# Altium PCB РАЗВОДКА.PcbDoc
Units mm, origin at the board's own origin, x right, y up, seen from the top; angles counter-clockwise.
Board outline 102.8 x 50.03 mm, 2 copper layers (Top Layer, Bottom Layer); 77 components, 52 nets, 326 pads, 63 vias.
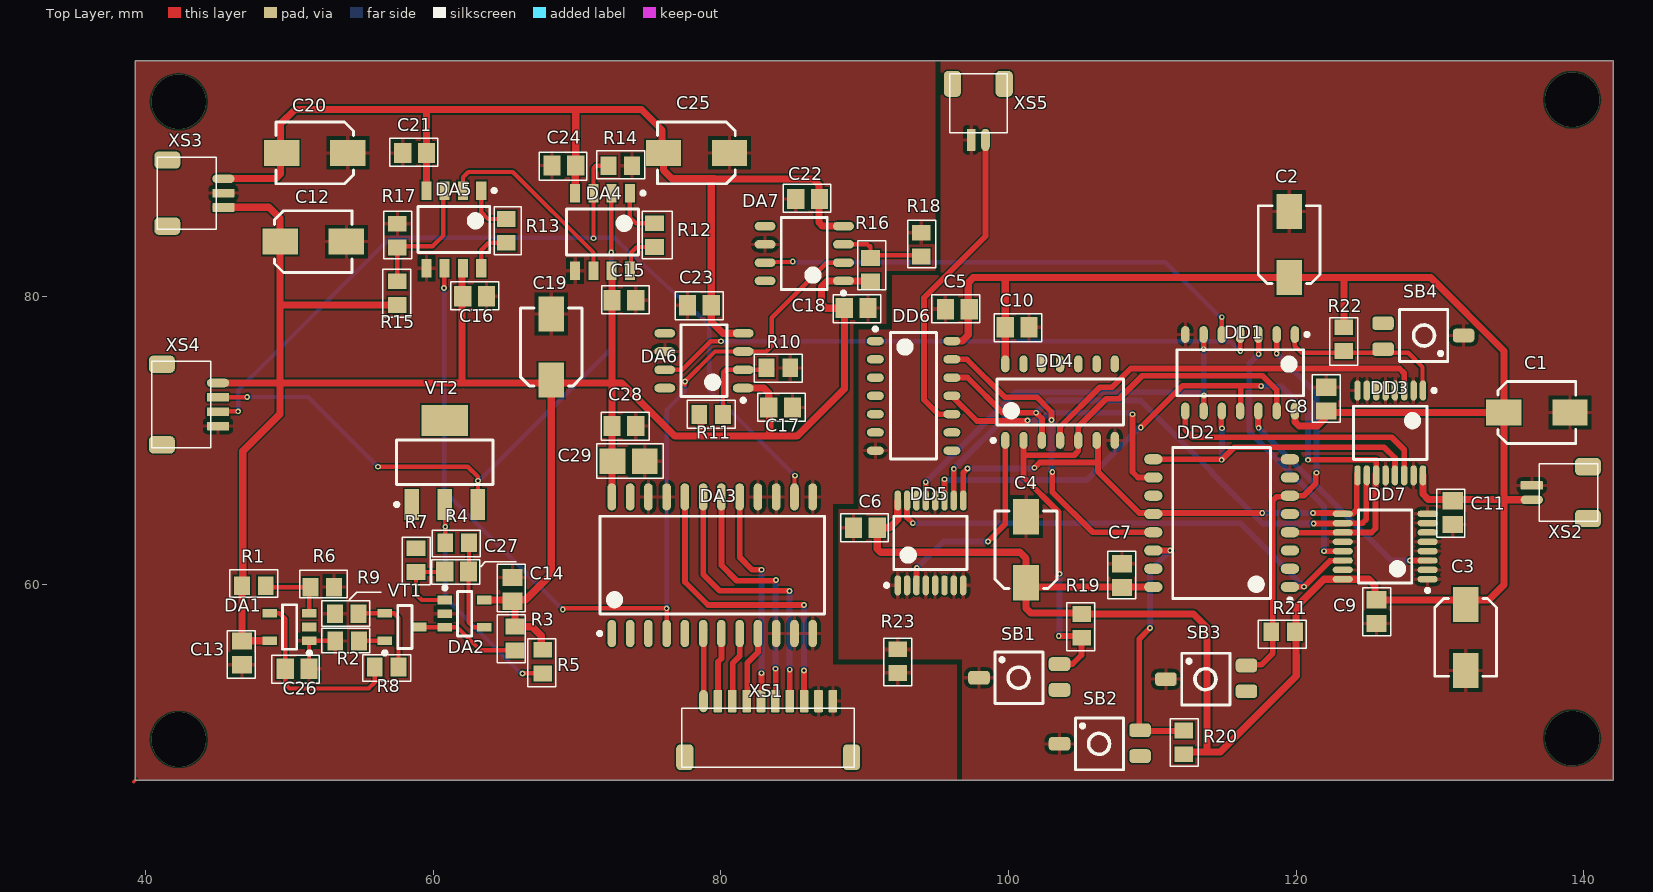
[diagram p0: Top Layer view]
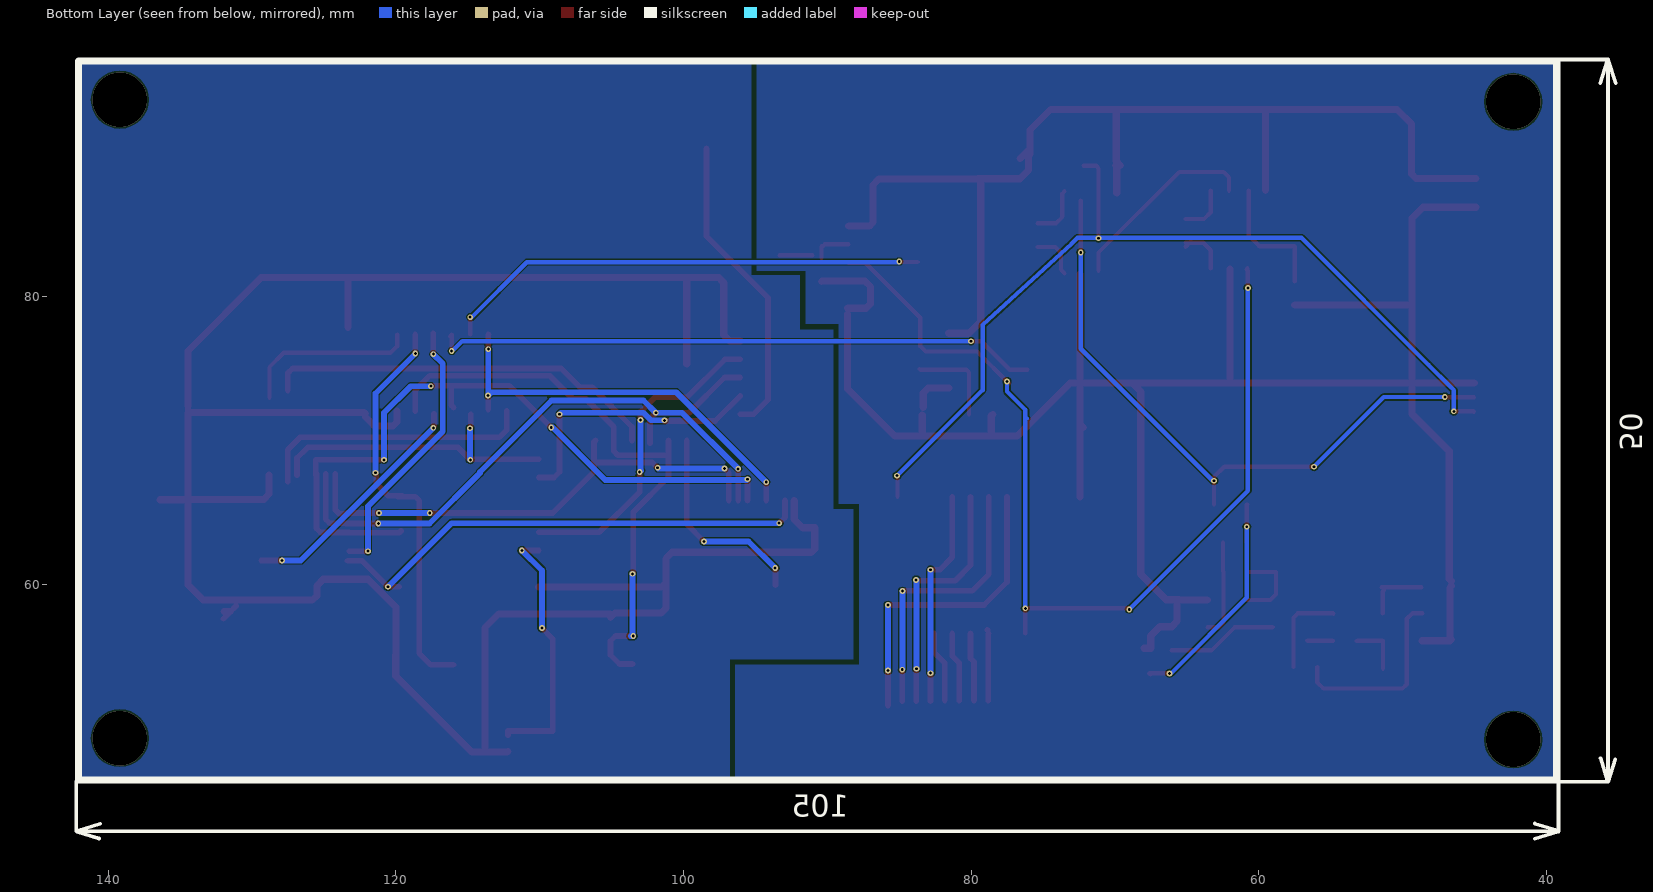
[diagram p1: Bottom Layer view, seen from below]
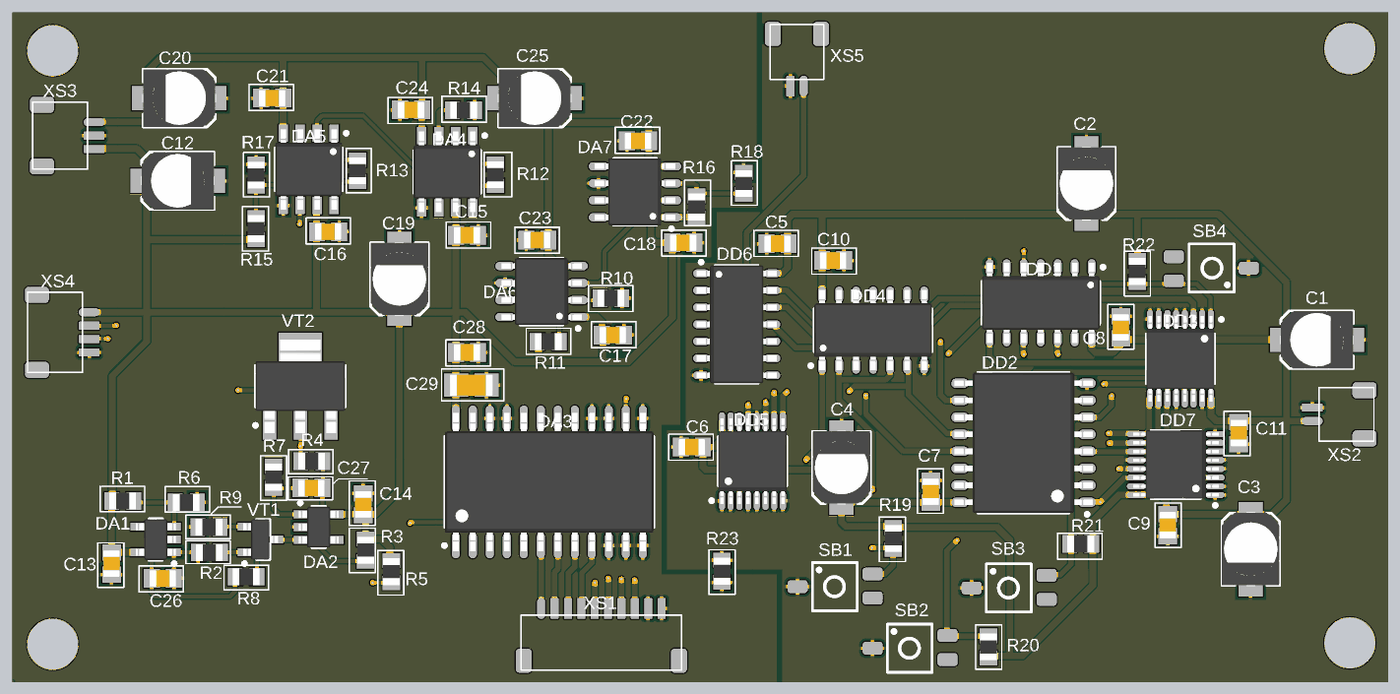
[diagram p2: 3D render of the assembled board from above, using the file's embedded part models]

## Layer stack, top to bottom
Top Solder: solder mask 0.0102, Solder Resist, Dk 3.5
Top Layer: signal copper 0.0356
Dielectric 1: dielectric 0.32, FR-4, Dk 4.8
Bottom Layer: signal copper 0.0356
Bottom Solder: solder mask 0.0102, Solder Resist, Dk 3.5

## Board outline
39.275,46.375 39.275,96.4 142.075,96.4 142.075,46.375

## Design rules (kind name [scope] priority, off if disabled: settings)
Clearance [All] p1: gap=0.1 ignorepadtopadclearanceinfootprint=FALSE except(0: Arc-Hole Track-Hole SMDPad-Hole THPad-Hole Via-Hole Fill-Hole Poly-Hole Region-Hole Text-Hole)
PolygonConnect [All] p1: connectstyle=Relief reliefconductorwidth=0.254 reliefentries=4 polygonreliefangle="90 Angle" airgapwidth=0.254
RoutingVias [All] p1: holewidth=0.1 width=1.27 viastyle="Through Hole" minholewidth=0.1 minwidth=0.1 maxholewidth=5 maxwidth=5
SolderMaskExpansion [All] p1: expansion=0.102
Width [All] p1: maxlimit=1 minlimit=0.1 preferedwidth=0.3
30 further rules are at their usual default settings.

## Components (designator, comment, footprint, x,y, rotation, side; value= is the part's Value field where it differs from the comment)
C5 "0.1uF" "Кер.ЧИП конд. 0.1 мкФ X7R 50В 10% 0805" 96.45,79.125 r0 top
C6 "0.1uF" "Кер.ЧИП конд. 0.1 мкФ X7R 50В 10% 0805" 90.05,63.925 r0 top
C7 "0.1uF" "Кер.ЧИП конд. 0.1 мкФ X7R 50В 10% 0805" 107.9,60.6 r270 top
C8 "0.1uF" "Кер.ЧИП конд. 0.1 мкФ X7R 50В 10% 0805" 122.1,72.875 r270 top
C9 "0.1uF" "Кер.ЧИП конд. 0.1 мкФ X7R 50В 10% 0805" 125.6,58.1 r90 top
C10 "0.1uF" "Кер.ЧИП конд. 0.1 мкФ X7R 50В 10% 0805" 100.6,77.875 r180 top
C11 "0.1uF" "Кер.ЧИП конд. 0.1 мкФ X7R 50В 10% 0805" 130.9,64.975 r90 top
C13 "0.1uF" "Кер.ЧИП конд. 0.1 мкФ X7R 50В 10% 0805" 46.7,55.225 r90 top
C14 "0.1uF" "Кер.ЧИП конд. 0.1 мкФ X7R 50В 10% 0805" 65.5,59.65 r270 top
C15 "0.1uF" "Кер.ЧИП конд. 0.1 мкФ X7R 50В 10% 0805" 73.25,79.75 r180 top
C16 "0.1uF" "Кер.ЧИП конд. 0.1 мкФ X7R 50В 10% 0805" 62.875,80.025 r180 top
C17 "0.1uF" "Кер.ЧИП конд. 0.1 мкФ X7R 50В 10% 0805" 84.15,72.3 r180 top
C18 "0.1uF" "Кер.ЧИП конд. 0.1 мкФ X7R 50В 10% 0805" 89.4,79.2 r180 top
C21 "0.1uF" "Кер.ЧИП конд. 0.1 мкФ X7R 50В 10% 0805" 58.7,90 r180 top
C22 "0.1uF" "Кер.ЧИП конд. 0.1 мкФ X7R 50В 10% 0805" 86.025,86.8 r180 top
C23 "0.1uF" "Кер.ЧИП конд. 0.1 мкФ X7R 50В 10% 0805" 78.5,79.4 r180 top
C24 "0.1uF" "Кер.ЧИП конд. 0.1 мкФ X7R 50В 10% 0805" 69.075,89.125 r180 top
C26 "1000pF" "Кер.ЧИП конд. 100пФ NPO 50В 5% 0805, GRM2165C1H101J" 50.525,54.125 r0 top
C27 "2200pF" "Кер.ЧИП конд. 100пФ NPO 50В 5% 0805, GRM2165C1H101J" 61.625,60.875 r180 top
C28 "0.1uF" "Кер.ЧИП конд. 0.1 мкФ X7R 50В 10% 0805" 73.25,71 r180 top
C29 "47uF" "Кер.ЧИП конд. 47 мкФ X5R 20% 10В 1206" 73.575,68.55 r180 top
DA1 "DA6" "ОУ для источника тока" 50,57.025 r180 top
DA2 "DA7" "ОУ для источника тока" 62.175,57.95 r0 top
DA3 "AD7824" AD7824 79.4,61.325 r90 top (schematic designator DA33)
DA4 "INA118E_BB" "AD620 Инструмент.усилитель" 71.77,84.5 r270 top
DA5 "INA118E_BB_1" "AD620 Инструмент.усилитель" 61.425,84.675 r270 top
DA6 "AD8561" AD8561 78.825,75.55 r180 top
DA7 "AD8561" AD8561 85.8,83 r180 top
DD1 "И №1 (4 компонента)" 4x2И 116.11,74.71 r270 top
DD2 "НЕ №3 (4 компонента)" CD4044B 114.825,64.25 r180 top
DD3 "74HC40510" Мультиплексор 126.55,70.525 r270 top
DD4 "И №2 (2 компонента)" 4x2И 103.59,72.665 r90 top
DD5 "74HC40510" Мультиплексор 94.575,62.875 r90 top
DD6 "3И №1" 4x2И 93.4,73.1 r0 top
DD7 "74HC40510" Мультиплексор 126.2,62.625 r180 top
R1 "3k" "0.125Вт 0805 3 кОм, 5%, Чип резистор (SMD)" 47.525,59.9 r0 top
R2 "200" "0.125Вт 0805 3 кОм, 5%, Чип резистор (SMD)" 54,56.05 r0 top
R3 "470" "0.125Вт 0805 3 кОм, 5%, Чип резистор (SMD)" 65.675,56.225 r90 top
R4 "10k" "0.125Вт 0805 3 кОм, 5%, Чип резистор (SMD)" 61.65,62.875 r180 top
R5 "4.7" "0.125Вт 0805 3 кОм, 5%, Чип резистор (SMD)" 67.6,54.625 r90 top
R6 "2k" "0.125Вт 0805 3 кОм, 5%, Чип резистор (SMD)" 52.275,59.8 r0 top
R7 "330" "0.125Вт 0805 3 кОм, 5%, Чип резистор (SMD)" 58.8,61.675 r90 top
R8 "10k" "0.125Вт 0805 3 кОм, 5%, Чип резистор (SMD)" 56.75,54.25 r0 top
R9 "2k" "0.125Вт 0805 3 кОм, 5%, Чип резистор (SMD)" 53.975,57.95 r0 top
R10 "1.5k" "0.125Вт 0805 15Ом, 5%, Чип резистор (SMD)" 84,75.05 r180 top
R11 "8.2k" "0.125Вт 0805 82Ом, 5%, Чип резистор (SMD)" 79.325,71.8 r180 top
R12 "200k" "0.125Вт 0805 200 кОм, 5%, Чип резистор (SMD)" 75.375,84.275 r90 top
R13 "160k" "0.125Вт 0805 160 кОм, 5%, Чип резистор (SMD)" 65.075,84.575 r90 top
R14 "51k" "0.125Вт 0805 51 кОм, 5%, Чип резистор (SMD)" 73,89.1 r0 top
R15 "7.5k" "0.125Вт 0805 75Ом, 5%, Чип резистор (SMD)" 57.5,80.25 r90 top
R16 "1k" "0.125Вт 0805 91Ом, 5%, Чип резистор (SMD)" 90.4,81.875 r90 top
R17 "2.2k" "0.125Вт 0805 22Ом, 5%, Чип резистор (SMD)" 57.5,84.25 r270 top
R18 "56" "0.125Вт 0805 5.1Ом, 5%, Чип резистор (SMD)" 93.925,83.625 r270 top
R19 "10k" "0.125Вт 0805 3 кОм, 5%, Чип резистор (SMD)" 105.1,57.1 r90 top (schematic designator R22)
R20 "10k" "0.125Вт 0805 3 кОм, 5%, Чип резистор (SMD)" 112.2,49 r270 top
R21 "10k" "0.125Вт 0805 3 кОм, 5%, Чип резистор (SMD)" 119.1,56.7 r0 top
R22 "10k" "0.125Вт 0805 3 кОм, 5%, Чип резистор (SMD)" 123.325,77.05 r90 top (schematic designator R19)
R23 "0" "0.125Вт 0805 82Ом, 5%, Чип резистор (SMD)" 92.3,54.65 r270 top
SB1 "Выключатель кнопочный с замыкающим контактом" "Выключатель кнопочный ese21x" 100.7,53.5 r0 top (schematic designator SB4)
SB2 "Выключатель кнопочный с замыкающим контактом" "Выключатель кнопочный ese21x" 106.3,48.9 r0 top
SB3 "Выключатель кнопочный с замыкающим контактом" "Выключатель кнопочный ese21x" 113.7,53.4 r0 top
SB4 "Выключатель кнопочный с замыкающим контактом" "Выключатель кнопочный ese21x" 128.9,77.3 r180 top (schematic designator SB1)
VT1 "Транзистор N-канальный" "Транзистор N-канальный" 57.825,57.025 r0 top
VT2 "Транзистор р-канальный" "Транзистор р-канальный" 60.8,68.475 r90 top
XS1 "XS 10Pin" CI1108M1H 77.29,49.67 r0 top
XS2 "XS 2Pin (D)" "CI1102M1H  (F)" 138.6,64.375 r90 top
XS3 "XS 3Pin (A)" "CI1108M1H - duplicate" 43.2,89.7 r270 top
XS4 "XS Датчик" CI1102M1H 42.825,75.5 r270 top
XS5 "XS 2Pin_1" "CI1102M1H  (F)" 99.9,93.1 r180 top
С1 "1uF" "ECAP SMD, 1 мкФ, 50В, Конденсатор электролитический алюминиевый SMD" 136.75,71.95 r0 top
С2 "1uF" "ECAP SMD, 1 мкФ, 50В, Конденсатор электролитический алюминиевый SMD" 119.525,83.625 r90 top
С3 "1uF" "ECAP SMD, 1 мкФ, 50В, Конденсатор электролитический алюминиевый SMD" 131.8,56.3 r270 top
С4 "1uF" "ECAP SMD, 1 мкФ, 50В, Конденсатор электролитический алюминиевый SMD" 101.225,62.4 r90 top
С12 "1uF" "ECAP SMD, 1 мкФ, 50В, Конденсатор электролитический алюминиевый SMD" 51.65,83.825 r0 top
С19 "1uF" "ECAP SMD, 1 мкФ, 50В, Конденсатор электролитический алюминиевый SMD" 68.2,76.5 r90 top
С20 "1uF" "ECAP SMD, 1 мкФ, 50В, Конденсатор электролитический алюминиевый SMD" 51.75,90 r180 top
С25 "1uF" "ECAP SMD, 1 мкФ, 50В, Конденсатор электролитический алюминиевый SMD" 78.3,90 r180 top

## Footprints (in the part's own frame and the unit in brackets; to place one, negate y for a bottom-side part, rotate by r counter-clockwise, add the part's x,y. Pads: shape width x height; smd on the part's side, far side on the other; paste and mask are expansions set on the pad)
"0.125Вт 0805 3 кОм, 5%, Чип резистор (SMD)" [mm]
  rect 1.1x1.3 smd: 1(-0.825,0) 2(0.825,0)
  body extent -1,-0.63 1,0.63, height 0.5
"0.125Вт 0805 5.1Ом, 5%, Чип резистор (SMD)" [mm]
  rect 1.1x1.3 smd: 1(-0.825,0) 2(0.825,0)
  body extent -1,-0.63 1,0.63, height 0.5
"0.125Вт 0805 15Ом, 5%, Чип резистор (SMD)" [mm]
  rect 1.1x1.3 smd: 1(-0.825,0) 2(0.825,0)
  body extent -1,-0.63 1,0.63, height 0.5
"0.125Вт 0805 22Ом, 5%, Чип резистор (SMD)" [mm]
  rect 1.1x1.3 smd: 1(-0.825,0) 2(0.825,0)
  body extent -1,-0.63 1,0.63, height 0.5
"0.125Вт 0805 51 кОм, 5%, Чип резистор (SMD)" [mm]
  rect 1.1x1.3 smd: 1(-0.825,0) 2(0.825,0)
  body extent -1,-0.63 1,0.63, height 0.5
"0.125Вт 0805 75Ом, 5%, Чип резистор (SMD)" [mm]
  rect 1.1x1.3 smd: 1(-0.825,0) 2(0.825,0)
  body extent -1,-0.63 1,0.63, height 0.5
"0.125Вт 0805 82Ом, 5%, Чип резистор (SMD)" [mm]
  rect 1.1x1.3 smd: 1(-0.825,0) 2(0.825,0)
  body extent -1,-0.63 1,0.63, height 0.5
"0.125Вт 0805 91Ом, 5%, Чип резистор (SMD)" [mm]
  rect 1.1x1.3 smd: 1(-0.825,0) 2(0.825,0)
  body extent -1,-0.63 1,0.63, height 0.5
"0.125Вт 0805 160 кОм, 5%, Чип резистор (SMD)" [mm]
  rect 1.1x1.3 smd: 1(-0.825,0) 2(0.825,0)
  body extent -1,-0.63 1,0.63, height 0.5
"0.125Вт 0805 200 кОм, 5%, Чип резистор (SMD)" [mm]
  rect 1.1x1.3 smd: 1(-0.825,0) 2(0.825,0)
  body extent -1,-0.63 1,0.63, height 0.5
4x2И [mm] "MC74ACT08DG, Логический элемент И, 74ACT08, 2 входа, 24мА, 4.5В до 5.5В, SOIC-14"
  oval 1.18x0.58 smd: 1(-2.66,3.81) 2(-2.66,2.54) 3(-2.66,1.27) 4(-2.66,0) 5(-2.66,-1.27) 6(-2.66,-2.54) 7(-2.66,-3.81) 8(2.66,-3.81) 9(2.66,-2.54) 10(2.66,-1.27) 11(2.66,0) 12(2.66,1.27) 13(2.66,2.54) 14(2.66,3.81)
  silkscreen extent -2.78,-4.4 1.6,4.78, body extent -3,-4.4 3,4.4, height 1.75
"AD620 Инструмент.усилитель" [mm] "SOIC, 8-Leads, Body 4,90x3,90mm, Pitch 1,27mm, IPC Medium Density"
  rect 1.28x0.7 smd: 1(-2.7,1.905) 2(-2.7,0.635) 3(-2.7,-0.635) 4(-2.7,-1.905) 5(2.7,-1.905) 6(2.7,-0.635) 7(2.7,0.635) 8(2.7,1.905)
  silkscreen extent -2.82,-2.5 1.6,2.93, body extent -3,-2.5 3,2.5, height 1.75
AD7824 [mm] "SOIC, 24-Leads, Body 15,40x7,50mm, Pitch 1,27mm, IPC Medium Density"
  oval 1.9x0.6 smd: 1(-4.75,6.985) 2(-4.75,5.715) 3(-4.75,4.445) 4(-4.75,3.175) 5(-4.75,1.905) 6(-4.75,0.635) 7(-4.75,-0.635) 8(-4.75,-1.905) 9(-4.75,-3.175) 10(-4.75,-4.445) 11(-4.75,-5.715) 12(-4.75,-6.985) 13(4.75,-6.985) 14(4.75,-5.715) 15(4.75,-4.445) 16(4.75,-3.175) 17(4.75,-1.905) 18(4.75,-0.635) 19(4.75,0.635) 20(4.75,1.905) 21(4.75,3.175) 22(4.75,4.445) 23(4.75,5.715) 24(4.75,6.985)
  silkscreen extent -4.87,-7.8 3.4,7.96, body extent -5.16,-7.8 5.16,7.8, height 2.65
AD8561 [mm] "SOIC, 8-Leads, Body 4,90x3,90mm, Pitch 1,27mm, IPC Medium Density"
  oval 1.45x0.6 smd: 1(-2.725,1.905) 2(-2.725,0.635) 3(-2.725,-0.635) 4(-2.725,-1.905) 5(2.725,-1.905) 6(2.725,-0.635) 7(2.725,0.635) 8(2.725,1.905)
  silkscreen extent -2.85,-2.5 1.6,2.88, body extent -3,-2.5 3,2.5, height 1.75
CD4044B [mm] "SOIC, 16-Leads, Body 10,30x7,50mm, Pitch 1,27mm, IPC Medium Density"
  oval 1.28x0.7 smd: 1(-4.75,4.445) 2(-4.75,3.175) 3(-4.75,1.905) 4(-4.75,0.635) 5(-4.75,-0.635) 6(-4.75,-1.905) 7(-4.75,-3.175) 8(-4.75,-4.445) 9(4.75,-4.445) 10(4.75,-3.175) 11(4.75,-1.905) 12(4.75,-0.635) 13(4.75,0.635) 14(4.75,1.905) 15(4.75,3.175) 16(4.75,4.445)
  silkscreen extent -4.88,-5.25 3.4,5.47, body extent -5.16,-5.25 5.16,5.25, height 2.65
CI1102M1H [mm]
  oval 0.6x1.55 smd: 1(1.5,2.2)
  rrect20% 0.6x1.55 smd: 2(2.5,2.2) 3(3.5,2.2) 4(4.5,2.2)
  rrect50% 1.2x1.8 smd: 5(0.2,-1.7) 6(5.8,-1.7)
  silkscreen extent 0,-2.4 6,1.7
"CI1102M1H  (F)" [mm]
  oval 0.6x1.55 smd: 1(1.5,2.2)
  rrect20% 0.6x1.55 smd: 2(2.5,2.2)
  rrect50% 1.2x1.8 smd: 3(0.2,-1.7) 4(3.8,-1.7)
  silkscreen extent 0,-2.4 4,1.7
CI1108M1H [mm]
  oval 0.6x1.55 smd: 1(1.5,2.2)
  rrect20% 0.6x1.55 smd: 2(2.5,2.2) 3(3.5,2.2) 4(4.5,2.2) 5(5.5,2.2) 6(6.5,2.2) 7(7.5,2.2) 8(8.5,2.2) 9(9.5,2.2) 10(10.5,2.2)
  rrect50% 1.2x1.8 smd: 11(0.2,-1.7) 12(11.8,-1.7)
  silkscreen extent 0,-2.4 12,1.7
"CI1108M1H - duplicate" [mm]
  rrect20% 0.6x1.55 smd: 1(3.5,2.2) 2(2.5,2.2)
  oval 0.6x1.55 smd: 3(1.5,2.2)
  rrect50% 1.2x1.8 smd: 4(0.2,-1.7) 5(4.8,-1.7)
  silkscreen extent 0,-2.4 5,1.7
"ECAP SMD, 1 мкФ, 50В, Конденсатор электролитический алюминиевый SMD" [mm] "ECAP SMD, 1 мкФ, 50В, Конденсатор электролитический алюминиевый SMD"
  rect 2.45x1.8 smd: 1(-2.3,0) 2(2.3,0)
  silkscreen extent -2.7,-2.15 2.7,2.15, body extent -2.75,-2.15 2.75,2.15, height 5.4
"Выключатель кнопочный ese21x" [mm] "SOTFL, 3-Leads, Body 3,62x1,60mm, Pitch 1,50mm, IPC Medium Density"
  rrect50% 1.5x0.95 smd: 1(-2.75,0) 2(2.85,0.95) 3(2.85,-0.85)
  silkscreen extent -1.65,-1.8 1.7,1.8
"Кер.ЧИП конд. 0.1 мкФ X7R 50В 10% 0805" [mm]
  rect 1.2x1.4 smd: 1(-0.825,0) 2(0.825,0)
  body extent -1,-0.63 1,0.63, height 1.3
"Кер.ЧИП конд. 47 мкФ X5R 20% 10В 1206" [mm] "Кер.ЧИП конд. 47 мкФ X5R 20% 10В 1206"
  rect 1.8x1.75 smd: 1(-1.125,0) 2(1.125,0)
  body extent -1.6,-0.8 1.6,0.8, height 1.5
"Кер.ЧИП конд. 100пФ NPO 50В 5% 0805, GRM2165C1H101J" [mm]
  rect 1.2x1.4 smd: 1(-0.825,0) 2(0.825,0)
  body extent -1,-0.63 1,0.63, height 1.3
Мультиплексор [mm] "TSOP, 16-Leads, Body 5,00x4,40mm, Pitch 0,65mm, IPC Medium Density"
  oval 1.4x0.45 smd: 1(-2.95,2.275) 2(-2.95,1.625) 3(-2.95,0.975) 4(-2.95,0.325) 5(-2.95,-0.325) 6(-2.95,-0.975) 7(-2.95,-1.625) 8(-2.95,-2.275) 9(2.95,-2.275) 10(2.95,-1.625) 11(2.95,-0.975) 12(2.95,-0.325) 13(2.95,0.325) 14(2.95,0.975) 15(2.95,1.625) 16(2.95,2.275)
  silkscreen extent -3.07,-2.55 1.85,3.17, body extent -3.2,-2.55 3.2,2.55, height 0.95
"ОУ для источника тока" [mm] "SOT23, 5-Leads, Body 2,90x2,80mm, Pitch 0,95mm, IPC Medium Density"
  rect 1x0.6 smd: 1(-1.375,0.95) 2(-1.375,0) 3(-1.375,-0.95) 4(1.375,-0.95) 5(1.375,0.95)
  silkscreen extent -1.5,-1.55 0.5,1.92, body extent -1.5,-1.53 1.5,1.53, height 1.45
"Транзистор N-канальный" [mm] "SOT23, 3-Leads, Body 2,92x2,45mm, Pitch 0,95mm, IPC Medium Density"
  rect 1x0.6 smd: 1(-1.2,-0.95) 2(-1.2,0.95) 3(1.2,0)
  silkscreen extent -1.32,-1.92 0.7,1.5, body extent -1.3,-1.52 1.3,1.52, height 1.12
"Транзистор р-канальный" [mm] "SOT223, 4-Leads, Body 6,50x7,00mm (avg), Pitch 2,30mm, IPC Medium Density"
  rect 2.15x1 smd: 1(-2.925,2.3) 2(-2.925,0) 3(-2.925,-2.3)
  rect 2.15x3.25 smd: 4(2.925,0)
  silkscreen extent -3.05,-3.35 1.55,3.47, body extent -3.5,-3.35 3.5,3.35, height 1.75

## Part data
C5 C6 C7 C8 C9 C10 C11 C13 C14 C15 C16 C17 C18 C21 C22 C23 C24 C28: library part "Кер.ЧИП конд. 0.1 мкФ X7R 50В 10% 0805", "Кер.ЧИП конд. 0.1 мкФ X7R 50В 10% 0805"
C26 C27: library part "Кер.ЧИП конд. 100пФ NPO 50В 5% 0805, GRM2165C1H101J", "Кер.ЧИП конд. 100пФ NPO 50В 5% 0805, GRM2165C1H101J"
C29: library part "Кер.ЧИП конд. 47 мкФ X5R 20% 10В 1206", "Кер.ЧИП конд. 47 мкФ X5R 20% 10В 1206"
DA1 DA2: library part "OPAx333 1.8-V, microPower, CMOS Operational Amplifiers, Zero-Drift Series", "ОУ"
DD3 DD5 DD7: library part Мультиплексор
R1 R2 R3 R4 R5 R6 R7 R8 R9 R19 R20 R21 R22: library part "0.125Вт 0805 5кОм, 5%, Чип резистор (SMD)", "0.125Вт 0805 5кОм, 5%, Чип резистор (SMD)"
R10: library part "0.125Вт 0805 15Ом, 5%, Чип резистор (SMD)_2_1", "0.125Вт 0805 15Ом, 5%, Чип резистор (SMD)"
R11 R23: library part "0.125Вт 0805 82Ом, 5%, Чип резистор (SMD)_2_2", "0.125Вт 0805 82Ом, 5%, Чип резистор (SMD)"
R12: library part "0.125Вт 0805 200 кОм, 5%, Чип резистор (SMD)", "0.125Вт 0805 200 кОм, 5%, Чип резистор (SMD)"
R13: library part "0.125Вт 0805 160 кОм, 5%, Чип резистор (SMD)", "0.125Вт 0805 160 кОм, 5%, Чип резистор (SMD)"
R14: library part "0.125Вт 0805 51 кОм, 5%, Чип резистор (SMD)", "0.125Вт 0805 51 кОм, 5%, Чип резистор (SMD)"
R15: library part "0.125Вт 0805 75Ом, 5%, Чип резистор (SMD)", "0.125Вт 0805 75Ом, 5%, Чип резистор (SMD)"
R16: library part "0.125Вт 0805 91кОм, 5%, Чип резистор (SMD)_1", "0.125Вт 0805 91Ом, 5%, Чип резистор (SMD)"
R17: library part "0.125Вт 0805 22Ом, 5%, Чип резистор (SMD)", "0.125Вт 0805 22Ом, 5%, Чип резистор (SMD)"
R18: library part "0.125Вт 0805 5.1Ом, 5%, Чип резистор (SMD)_2", "0.125Вт 0805 5.1Ом, 5%, Чип резистор (SMD)"
VT1: "SI2304DDS-T1-GE3"
VT2: "NTF2955T1G, МОП-транзистор, P Канал, 2.6 А, -60 В, 0.17 Ом, 20 В, -4 В"
С1 С2 С3 С4 С12 С19 С20 С25: library part "ECAP SMD, 1 мкФ, 50В, Конденсатор электролитический алюминиевый SMD", "ECAP SMD, 1 мкФ, 50В, Конденсатор электролитический алюминиевый SMD"

## Via types
v1: diameter 0.4, hole 0.2, Top Layer to Bottom Layer, 59 vias
v2: diameter 3.8, hole 3.8, Top Layer to Bottom Layer, 4 vias

## Nets (pads, with @x,y where several pads share a name; then routed paths per layer and width w, separated by ;. In a path a pad name is that pad's centre, name@x,y a point inside that pad or via, vN(x,y) a via of type N, cw(c..) or ccw(c..) an arc to the next point about the centre after c; other vN are vias at no path point)
"+5V A": C13.2 C14.2 C15.2 C16.2 C17.2 C18.2 C28.2 C29.2 DA1.5 DA2.5 DA3.24 DA4.7 DA5.7 DA6.1 DA7.1 R1.1 R3.2 R5.2 R11.2 R15.1 R16.1 XS3.1 XS4.1 С12.1 С19.1 | length 156.4
  Top Layer w0.5: XS3.1@44.9,86.225 48.569,86.225 49.325,85.469 49.325,79.3 ; XS4.1@45,74 XS4.1 49.325,74 ; C13.2@46.6,56.15 C13.2 46.7,59.775 R1.1@46.6,59.875 ; R1.1@46.6,60.225 46.75,60.375 46.75,69.25 49.325,71.825 49.325,74 ; C13.2@46.782,56.075 DA1.5 ; R15.1 49.45,79.425 49.325,79.3 ; DA5.7@62,81.925 62,74 49.325,74 ; 62.15,74 72.424,74 ; DA2.5 65.499,58.924 66.424,58.924 68.2,60.7 68.2,73.4 С19.1@68.725,73.925 ; C14.2@65.675,58.575 65.675,57.425 66.05,57.05 66.875,57.05 67.5,56.425 67.5,55.55 R5.2@67.975,55.55 ; C28.2@72.175,70.9 C28.2@72.385,71.11 ; C28.2@72.35,71 72.415,70.935 DA3.24 ; DA4.7@72.424,81.561 72.424,74 ; C28.2 72.425,73.96 72.424,74 ; R11.2 R11.2@78.575,71.725 ; R11.2@78.6,71.725 78.6,70.3 ; DA6.1 82.98,73.645 83.325,73.3 C17.2 ; C17.2@83.4,71.775 83.4,70.3 ; C18.2 87.3,79.2 87,79.5 87,80.7 87.395,81.095 DA7.1 90.355,81.095 R16.1 ; C18.2@88.6,78.8 88.6,73.6 85.3,70.3 83.4,70.3 ; 49.325,74 49.325,79.3 ; 72.424,74 73.1,74 76.8,70.3 78.6,70.3 ; 78.6,70.3 83.4,70.3
"+5V D": C5.2 C6.2 C7.2 C8.2 C9.2 C10.2 C11.2 DD1.14 DD2.16 DD3.16 DD4.14 DD5.16 DD6.14 DD7.16 R19.2 R20.2 R21.2 R22.2 XS2.1 С1.1 С2.1 С3.1 С4.1 | length 178.2
  Top Layer w0.4: C8.2@122.125,71.625 C8.2@122.125,71.875 ; С3.1@131.1,58.5 131.5,58.1 С3.1@131.725,57.875 ; С3.1@131.95,58.1 С3.1@131.725,57.875 ; С3.1@132,57.6 С3.1@131.725,57.875 ; С1.1@134.47,71.95 С1.1@134.47,72.38
  Top Layer w0.5: DD5.16 92.3,64.5 91.725,63.925 C6.2 90.875,62.45 91.1,62.225 100.8,62.225 101.225,61.8 С4.1 ; DD6.14 96.785,76.91 97.2,77.325 97.2,80.975 97.55,81.325 99.775,81.325 ; DD4.14 99.78,77.87 C10.2 99.775,81.325 ; R19.2@105.075,57.7 104.775,58 101.55,58 101.225,58.325 С4.1 ; R19.2 112.875,57.925 113.8,57 113.8,48.325 ; DD2.16 101.52,59.805 С4.1 ; R20.2@112.2,48.375 112.25,48.325 113.8,48.325 ; DD1.14 119.92,71.28 120.2,71 121.5,71 C8.2@122.125,71.625 ; C8.2@122.125,71.875 122.2,71.95 134.47,71.95 134.47,65.875 ; R22.2 123.325,81.25 123.4,81.325 ; DD3.16 128.825,66.275 129.2,65.9 134.395,65.9 134.42,65.875 ; С3.1@131.5,58.1 С3.1@131.95,58.1 ; С1.1@134.47,72.38 134.47,76.23 129.375,81.325 123.4,81.325 ; XS2.1 134.47,65.875 ; 99.775,81.325 С2.1 123.4,81.325 ; 113.8,48.325 114.725,48.325 120.013,53.613 120.005,56.7 120,58.4 121.95,60.35 DD7.16 125.05,60.35 125.5,59.9 125.5,59.2 125.8,58.9 133.4,58.9 134.47,59.97 134.47,65.825 134.42,65.875 ; 134.42,65.875 134.47,65.875
"-5V A": C21.1 C22.1 C23.1 C24.1 DA4.4 DA5.4 DA6.4 DA7.4 XS3.3 С20.2 С25.2 | length 79.4
  Top Layer w0.5: XS3.3@44.9,88.225 49.05,88.225 49.375,88.55 49.375,92.025 50.375,93.025 59.52,93.025 ; DA5.4 59.52,93.025 ; C24.1@69.6,89.125 69.9,89.425 69.9,93.025 ; DA4.4 69.865,89.04 C24.1@69.95,89.125 ; С25.2@75.9,89.9 75.9,91.6 74.475,93.025 69.9,93.025 ; С25.2@76.6,89.6 76,90.2 С25.2 76,88.8 76.6,88.2 79.325,88.2 ; DA6.4 80.145,77.455 79.325,78.275 C23.1 79.325,88.2 ; DA7.4 87.07,84.905 86.825,85.15 86.825,87.775 86.425,88.175 79.525,88.175 79.55,88.2 79.325,88.2 ; 59.52,93.025 69.9,93.025
A: C13.1 C14.1 C15.1 C16.1 C17.1 C18.1 C21.2 C22.2 C23.2 C24.2 C26.2 C28.1 C29.1 DA1.1 DA2.2 DA3.10 DA3.11 DA3.12 DA3.13 DA3.15 DA3.16 DA3.21 DA3.22 DA4.5 DA5.5 DA6.6 DA7.6 R2.1 R6.2 R9.1 R10.1 R14.2 R17.1 R18.1 R23.2 XS1.9 XS1.10 XS3.2 XS4.4 С12.2 С19.2 С20.1 С25.1 | length 3.8
  Top Layer w0.3: C26.2 51.35,56.05 DA1.1 53.15,56.075 R2.1
D: C5.1 C6.1 C7.1 C8.1 C9.1 C10.1 C11.1 DD1.7 DD2.8 DD3.2 DD3.4 DD3.5 DD3.7 DD3.8 DD3.12 DD3.15 DD4.7 DD5.1 DD5.2 DD5.4 DD5.5 DD5.7 DD5.8 DD5.12 DD6.7 DD7.1 DD7.2 DD7.4 DD7.5 DD7.7 DD7.8 DD7.12 DD7.15 R23.1 SB1.1 SB2.1 SB3.1 SB4.1 XS2.2 XS5.2 С1.2 С2.2 С3.2 С4.2
NetC26_1: C26.1 DA1.4 R8.1 | length 13.4
  Top Layer w0.3: DA1.4 49.325,57.975 49.7,57.6 C26.1 49.7,53.05 50,52.75 55.5,52.75 55.925,53.175 R8.1
NetC27_1: C27.1 DA2.4 R4.1 | length 6.8
  Top Layer w0.3: R4.1 62.475,60.9 C27.1 62.45,57.35 62.8,57 DA2.4
NetC27_2: C27.2 DA2.1 R7.1 | length 5.8
  Top Layer w0.3: DA2.1@60.775,58.925 DA2.1 59.2,58.9 58.8,59.3 R7.1 60.775,60.85 C27.2
NetDA1_3: DA1.3 R1.2 R6.1 | length 4.4
  Top Layer w0.3: R1.2@48.7,59.8 R6.1 ; R6.1@51.3,59.575 51.375,59.5 DA1.3
NetDA2_3: DA2.3 R3.1 VT1.3 | length 7.7
  Top Layer w0.3: VT1.3 59.05,57 DA2.3 61.675,57 63.275,55.4 R3.1 R3.1@66.05,55.4
NetDA4_1: DA4.1 R12.2 | length 3.7
  Top Layer w0.3: DA4.1@73.505,87.325 73.65,87.18 73.65,85.55 74.1,85.1 R12.2
NetDA4_2: DA4.2 VT2.3 XS4.2 | length 45.7
  Top Layer w0.3: XS4.2 47.025,73 v1(47.05,73.025) ; v1(56.15,68.175) 62.4,68.175 63.1,67.475 v1(63.1,67.2) VT2.3 ; v1(72.375,83.075) DA4.2@72.375,86.665
  Bottom Layer w0.3: v1(47.05,73.025) 51.3,73.025 v1(56.15,68.175) ; v1(63.1,67.2) 63.2,67.2 72.375,76.375 v1(72.375,83.075)
NetDA4_3: DA3.14 DA4.3 R14.1 XS4.3 | length 62.9
  Top Layer w0.3: XS4.3 45.05,72.025 v1(46.425,72.025) ; v1(71.135,84.065) DA4.3 71.135,88.935 71.3,89.1 R14.1 ; v1@85.1,67.6 85.115,67.585 DA3.14
  Bottom Layer w0.3: v1(46.425,72.025) 46.425,73.5 46.675,73.75 48.212,75.287 57.025,84.1 72.6,84.1 72.995,83.704 79.2,78.028 79.2,73.5 v1(85.15,67.55)
NetDA4_6: DA4.6 DA5.2 | length 13.7
  Top Layer w0.3: DA5.2 62.06,88.31 62.425,88.675 65.525,88.675 71.135,83.065 DA4.6
NetDA4_8: DA4.8 R12.1 | length 3.3
  Top Layer w0.3: DA4.8@73.505,81.625 73.75,81.87 73.75,83.05 74.15,83.45 R12.1
NetDA5_1: DA5.1 R13.2 | length 3.4
  Top Layer w0.3: DA5.1 63.33,85.87 63.8,85.4 R13.2
NetDA5_3: DA5.3 R15.2 R17.2 | length 9
  Top Layer w0.3: R15.2 R17.2 ; R17.2@57.5,83.5 59.95,83.5 60.7,84.25 DA5.3@60.7,87.375
NetDA5_6: DA3.4 DA5.6 DA6.3 DA7.2 | length 68.8
  Top Layer w0.3: v1(60.75,80.6) 60.75,81.815 60.85,81.915 DA5.6 ; v1@69,58.325 v1(76.225,58.325) DA3.4 ; v1(77.5,74.1) 77.5,73.87 77.385,73.985 79.585,76.185 DA6.3 83.16,76.185 83.538,76.563 83.538,78.538 87.365,82.365 DA7.2
  Bottom Layer w0.3: v1(60.75,80.6) 60.75,66.5 v1(69,58.25) ; 76.125,71.525 76.225,71.625 ; v1(76.225,58.325) 76.225,71.625 ; v1(77.5,74.1) 77.5,73.4 76.225,72.125 76.225,71.625
NetDA5_8: DA5.8 R13.1 | length 3.7
  Top Layer w0.3: DA5.8 63.33,83.23 63.85,83.75 R13.1@64.8,83.75 ; R13.1@64.7,83.85 R13.1@64.8,83.75 ; R13.1@65.075,83.475 R13.1@64.8,83.75 ; R13.1 R13.1@64.8,83.75
NetDA6_2: DA6.2 R10.2 R11.1 | length 6.5
  Top Layer w0.3: R11.1 80.15,74.75 80.315,74.915 DA6.2 83.515,74.915 R10.2@83.575,74.975
NetDA6_7: DA6.7 DD1.4 | length 42.2
  Top Layer w0.3: DA6.7 77.315,74.915 79.3,76.9 v1(80,76.9) ; v1@116.11,76.335 DD1.4 116.225,77.255 DD1.4@116.15,77.18
  Bottom Layer w0.3: v1(80,76.9) 115.4,76.9 v1@115.975,76.325
  other v1: 116.125,76.225
NetDA7_3: DA7.3 R16.2 R18.2 | length 5
  Top Layer w0.3: DA7.3 90.19,83.635 90.325,83.5 90.4,83.5 R16.2 ; R16.2@91.025,82.875 91.925,82.875 R18.2@93.325,82.875
NetDA7_7: DA7.7 DD1.5 | length 34
  Top Layer w0.3: DA7.7@83.7,82.415 v1@85.06,82.415 ; DD1.5 v1(114.84,78.575)
  Bottom Layer w0.3: v1@85,82.4 110.9,82.4 v1@114.782,78.517
  other v1: 85,82.45
NetDA33_6: DA3.6 XS1.1 | length 4.7
  Top Layer w0.4: DA3.6 78.8,56.54 XS1.1@78.8,51.9 ; DA3.6@78.845,56.8 DA3.6@78.87,56.825
NetDA33_7: DA3.7 XS1.2 | length 4.8
  Top Layer w0.4: XS1.2@79.805,51.915 79.805,54.605 80.035,54.835 DA3.7
NetDA33_8: DA3.8 XS1.3 | length 4.9
  Top Layer w0.4: XS1.3@80.825,51.9 80.825,54.525 81.305,55.005 DA3.8
NetDA33_9: DA3.9 XS1.4 | length 5
  Top Layer w0.4: XS1.4@81.83,51.915 81.83,54.53 82.575,55.275 DA3.9
NetDA33_17: DA3.17 XS1.5 | length 15.2
  Top Layer w0.4: DA3.17 81.305,61.87 82.165,61.01 v1(82.815,61.01) ; XS1.5@82.815,51.87 v1(82.815,53.815)
  Bottom Layer w0.4: v1(82.815,53.815) v1(82.815,61.01)
NetDA33_18: DA3.18 XS1.6 | length 17.4
  Top Layer w0.4: DA3.18 80.035,61.315 81.1,60.25 v1@83.775,60.25 ; v1(83.8,54.125) 83.82,54.105 XS1.6@83.82,51.885
  Bottom Layer w0.4: v1(83.8,54.125) v1@83.8,60.3
  other v1: 83.825,60.3
NetDA33_19: DA3.19 XS1.7 | length 19.4
  Top Layer w0.4: DA3.19 78.765,60.685 79.9,59.55 v1@84.725,59.55 ; XS1.7 v1(84.79,54.06)
  Bottom Layer w0.4: v1@84.775,54.1 v1(84.775,59.525)
NetDA33_20: DA3.20 XS1.8 | length 21.8
  Top Layer w0.4: DA3.20 77.495,60.155 79.1,58.55 v1(85.775,58.55) ; XS1.8@85.775,51.575 v1(85.775,54)
  Bottom Layer w0.4: v1(85.775,54) v1(85.775,58.55)
NetDD1_1: DD1.1 DD3.1 R22.1 SB4.2 | length 12.4
  Top Layer w0.3: DD1.1 119.92,76.555 120.375,76.1 127.8,76.1 128.8,75.1 DD3.1@128.8,72.975
NetDD1_2: DD1.2 DD2.6 R21.1 SB3.2 | length 28.6
  Top Layer w0.4: SB3.2@116,54.4 116.8,54.4 117.6,54.4 118.375,55.175 118.375,65.825 118.635,66.085 DD2.6@119.875,66.085 ; v1(118.65,76.05) DD1.2 ; DD2.6 120.53,66.155 121.375,67 v1@121.375,67.712
  Bottom Layer w0.4: v1(118.65,76.05) 121.425,73.275 v1(121.425,67.75)
NetDD1_3: DD1.3 DD7.13 | length 18.9
  Top Layer w0.4: v1(117.4,76) DD1.3@117.4,77.45 ; v1(121.95,62.3) DD7.13
  Bottom Layer w0.4: v1(117.4,76) 116.75,75.35 116.75,70.625 121.95,65.425 v1(121.95,62.3)
NetDD1_6: DD1.6 DD1.9 DD5.13 | length 28.4
  Top Layer w0.4: DD5.13 v1(94.25,67.1) ; DD1.6 113.575,77.375 v1(113.575,76.35) ; DD1.9@113.575,72.15 v1@113.575,73
  Bottom Layer w0.4: v1(94.25,67.1) 100.5,73.35 113.375,73.35 v1@113.575,73.15 ; v1(113.575,76.35) v1@113.575,73.15 ; v1(113.6,73.125) v1@113.575,73.15
NetDD1_8: DD1.8 DD3.14 | length 19.3
  Top Layer w0.4: DD1.8 112.3,70.725 112.8,70.225 126.65,70.225 127.525,69.35 DD3.14 DD3.14@127.525,67.125
NetDD1_10: DD1.10 DD2.9 DD3.13 | length 21.7
  Top Layer w0.4: DD2.9 114.87,68.695 115.7,69.525 126.125,69.525 126.875,68.775 DD3.13 ; v1@114.8,70.975 DD1.10@114.8,71.825
  Bottom Layer w0.4: v1(114.825,68.65) 114.85,68.675 v1(114.85,70.85)
NetDD1_11: DD1.11 DD2.4 DD3.11 DD5.11 DD7.11 | length 50.8
  Top Layer w0.4: DD5.11 v1(95.55,67.3) ; v1(109.2,70.9) 112.1,73.8 116.15,73.8 ; DD1.11@116,72.3 116.15,72.45 116.15,73.8 ; v1(117.575,73.775) 117.575,73.8 116.15,73.8 ; DD2.4@119.647,63.702 119.775,63.575 DD7.11@123.25,63.575 ; v1(120.825,68.65) 125.575,68.65 DD3.11 ; DD7.11 125.25,63.6 125.525,63.875 DD3.11@125.525,67.675
  Bottom Layer w0.4: v1(95.55,67.3) 95.6,67.25 105.45,67.25 109.1,70.9 v1(109.2,70.9) ; v1(117.575,73.775) 118.975,73.775 120.825,71.925 v1(120.825,68.65)
NetDD1_12: DD1.12 DD7.3 | length 16.6
  Top Layer w0.4: v1@117.35,71 DD1.12@117.35,71.85 ; v1(127.925,61.65) DD7.3 DD7.3@129.375,61.65
  Bottom Layer w0.4: v1(117.4,70.875) 126.625,61.65 v1(127.925,61.65)
NetDD1_13: DD1.13 DD4.2 DD4.5 R19.1 SB1.2 | length 42
  Top Layer w0.4: DD4.2 101.05,67.45 103.5,65 v1@103.5,60.725 ; 101.125,68.975 104.575,68.975 104.86,69.26 DD4.5 104.86,70.96 106.8,72.9 107.7,72.9 109.3,74.5 117.675,74.5 118.65,73.525 DD1.13 ; v1(103.5,56.4) 104.725,56.4 105.075,56.05 105.075,55.075 104.45,54.45 SB1.2
  Bottom Layer w0.4: v1(103.5,56.4) 103.675,56.4 103.55,56.525 v1(103.55,60.725)
NetDD2_1: DD2.1 DD5.15 DD7.14 | length 35.1
  Top Layer w0.4: DD5.15 92.95,64.65 v1(93.35,64.25) ; DD2.1@119.775,59.825 v1(120.55,59.825) 122.35,61.625 DD7.14@123.375,61.625
  Bottom Layer w0.4: v1(93.35,64.25) 116.125,64.25 v1(120.55,59.825)
NetDD2_10: DD2.10 DD6.11 | length 19.2
  Top Layer w0.4: DD6.11 97.81,71.35 v1@101.325,71.35 ; v1(108.625,71.825) 108.625,67.8 109,67.425 DD2.10
  Bottom Layer w0.4: v1(101.325,71.4) 102.268,71.4 102.793,71.925 108.525,71.925 v1(108.625,71.825)
NetDD2_12: DD2.12 DD3.9 DD4.6 DD5.9 DD7.9 | length 35.6
  Top Layer w0.4: DD5.9 96.85,67.775 96.875,67.775 v1(97.15,68.05) ; v1(101.8,68.1) 102.175,68.475 106.125,68.475 ; DD4.6 106.225,69.91 106.225,67.85 106.212,67.837 109.1,64.95 v1(117.65,64.95) ; v1(121.175,64.95) DD7.9@123.4,64.95 ; DD7.9 123.95,64.9 124.225,65.175 DD3.9@124.225,67.675
  Bottom Layer w0.4: v1(97.15,68.05) v1@101.75,68.05 ; v1(117.65,64.95) v1(121.175,64.95)
NetDD2_13: DD2.13 DD6.13 | length 22.3
  Top Layer w0.4: DD6.13 97.11,75.64 99.75,73 101.975,73 103,71.975 v1(103,71.425) ; v1(103.05,67.8) 103.05,66.425 105.86,63.615 DD2.13
  Bottom Layer w0.4: v1(103,71.425) 103,67.95 102.95,67.9 v1(103.05,67.8)
NetDD2_14: DD2.14 R20.1 SB2.2 | length 18
  Top Layer w0.4: v1(109.85,56.95) 109.1,56.2 109.1,49.8 112.2,49.8 R20.1@112.2,49.5 ; DD2.14 v1(111.245,62.345)
  Bottom Layer w0.4: v1(109.85,56.95) 109.85,60.95 v1(111.245,62.345)
NetDD3_3: DD3.3 DD4.4 | length 27.9
  Top Layer w0.4: DD4.4 103.59,70.94 106.35,73.7 107.2,73.7 108.5,75 127.2,75 127.525,74.675 DD3.3
NetDD3_10: DD3.10 DD4.3 DD5.10 DD6.12 DD7.10 | length 48.9
  Top Layer w0.4: DD6.12 97.15,74.37 99.595,71.925 v1(101.925,71.925) 102.325,71.525 DD4.3@102.325,69.8 ; DD5.10 v1(96.2,68.025) ; v1(121.225,64.225) DD7.10@123.45,64.225 ; DD7.10 124.625,64.25 124.875,64.5 DD3.10@124.875,67.675
  Bottom Layer w0.4: v1(96.2,68.025) 100.1,71.925 v1(101.925,71.925) 102.775,72.775 109.182,72.775 114.159,67.798 114.159,67.734 ; 114.275,67.618 117.668,64.225 v1(121.225,64.225)
NetDD4_1: DD4.1 DD5.3 | length 14.4
  Top Layer w0.4: DD5.3 v1@93.6,61.125 ; v1(98.575,62.975) 99.78,64.18 DD4.1
  Bottom Layer w0.4: v1(93.625,61.125) 95.475,62.975 v1(98.575,62.975)
NetDD6_10: DD6.10 XS5.1 | length 21.6
  Top Layer w0.4: DD6.10 95.12,71.83 94.125,72.825 94.125,79.925 98.4,84.2 XS5.1@98.4,90.3
NetR2_2: R2.2 VT1.1 | length 1.8
  Top Layer w0.3: R2.2 54.85,56.075 VT1.1
NetR4_2: R4.2 R5.1 VT2.2 | length 16.6
  Top Layer w0.3: VT2.2 60.825,65.525 v1(60.825,64) R4.2 ; v1(66.2,53.8) 67.5,53.8 67.55,53.75 R5.1
  Bottom Layer w0.3: v1(60.825,64) 60.825,59.075 66.1,53.8 v1(66.2,53.8)
NetR8_2: R8.2 R9.2 VT1.2 | length 6.3
  Top Layer w0.3: R9.2 54.825,57.975 VT1.2 57.275,57.975 57.575,57.675 R8.2
pads on no net: DA1.2 DA3.1 DA3.2 DA3.3 DA3.5 DA3.23 DA6.5 DA6.8 DA7.5 DA7.8 DD2.2 DD2.3 DD2.5 DD2.7 DD2.11 DD2.15 DD3.6 DD4.8 DD4.9 DD4.10 DD4.11 DD4.12 DD4.13 DD5.6 DD5.14 DD6.1 DD6.2 DD6.3 DD6.4 DD6.5 DD6.6 DD6.8 DD6.9 DD7.6 R7.2 SB1.3 SB2.3 SB3.3 SB4.3 VT2.1 VT2.4 XS1.11 XS1.12 XS2.3 XS2.4 XS3.4 XS3.5 XS4.5 XS4.6 XS5.3 XS5.4
copper on no net: | length 0.1
  Top Layer w0.254: 39.17,46.27 39.275,46.375
  other v2: 42.3,49.2 139.2,49.3 42.3,93.55 139.2,93.7

## Polygon pours and split planes (outlines as drawn)
A on Top Layer "GND A" (solid, pour order 6): 39.275,46.375 39.275,96.4 142.075,96.4 142.075,46.375
D on Top Layer "GND D" (solid, pour order 0): 89.6,65.2 88.2,65.2 88.2,54.8 96.8,54.8 96.8,46.375 110.8,46.375 142.075,46.375 142.075,96.4 95.25,96.4 95.25,81.5 91.875,81.5 91.875,77.8 89.6,77.8 89.6,77.7
A on Bottom Layer "GND A" (solid, pour order 7): 39.275,46.375 39.275,96.4 142.075,96.4 142.075,46.375
D on Bottom Layer "GND D" (solid, pour order 2): 89.6,65.2 88.2,65.2 88.2,54.8 96.8,54.8 96.8,46.375 136,46.375 142.075,46.375 142.075,96.4 95.275,96.4 95.275,81.5 91.9,81.5 91.9,77.7 89.6,77.7 89.6,77.6

## Other copper
Top Layer:
  pour cut-out: 94.9,96.4 94.9,81.8 92.608,81.8 91.5,81.8 91.5,78.1 89.792,78.1 89.2,78.1 89.2,65.6 87.792,65.6 87.792,54.4 96.4,54.4 96.4,46.375 96.8,46.375 96.8,54.8 88.2,54.8 88.2,65.2 89.6,65.2 89.6,77.692 91.9,77.692 91.9,81.5 95.3,81.5 95.3,96.4
Bottom Layer:
  pour cut-out: 95.3,96.85 94.9,96.85 94.9,81.8 92.608,81.8 91.5,81.8 91.5,78.1 89.792,78.1 89.2,78.1 89.2,65.6 87.792,65.6 87.792,54.4 96.4,54.4 96.4,45.975 96.8,45.975 96.8,54.8 88.2,54.8 88.2,65.2 89.6,65.2 89.6,77.692 91.9,77.692 91.9,81.5 95.3,81.5

## Silkscreen, mask and mechanical layers (free items; w line width, h text height)
Top Overlay:
  drawing of 185 lines, arcs and shapes, not listed
Bottom Overlay:
  lines w0.254: 35.175,94.85 35.675,96.45 ; 35.191,47.822 35.675,46.275 ; 35.7,96.5 35.7,46.27 39.17,46.27 ; 35.741,46.353 36.225,47.9 ; 35.75,96.4 36.234,94.853 ; 39.15,42.825 142.225,42.825 142.225,46.295 ; 39.2,42.8 40.8,42.3 ; 39.25,42.875 40.797,43.359 ; 140.575,43.35 142.122,42.866 ; 140.653,42.316 142.2,42.8
  lines w0.3: 35.7,96.5 39.2,96.5 ; 39.15,42.825 39.15,46.325
  lines w0.5: 39.275,46.375 39.275,96.4 142.075,96.4 142.075,46.375 39.3,46.375
  text "50" at 34.85,69.275 h1.52 r90
  text "105" at 88.525,43.825 h1.52